# EAGLE board SparkFun_MEMS_Microphone_Breakout_ICS40180 (EAGLE 9.6.2)
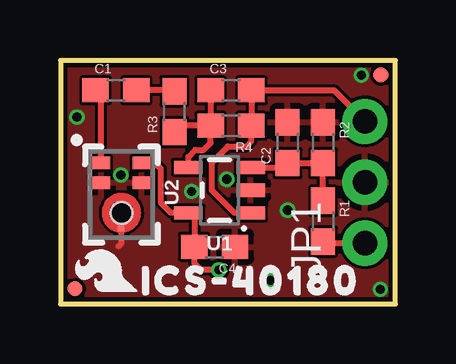
[diagram p0: board, top side]
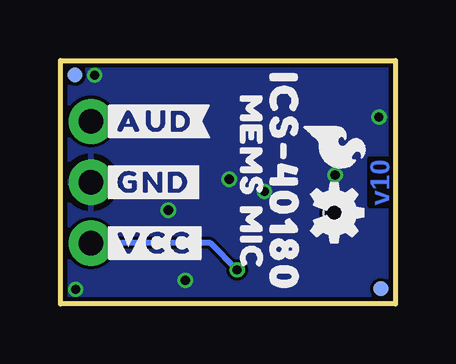
[diagram p1: board, bottom side, seen from below]

Size 13.97 x 10.16 mm. Coordinates in mm from the lower left corner, seen from the top.
Outline: 0,0 13.97,0 13.97,10.16 0,10.16 0,0
Copper layers (1*16): Top 0.035mm / dielectric 1.5mm / Bottom 0.035mm
Design rules "SparkFun-2-Layer-Minimum-JLCPCB": minimum track width 5mil, minimum drill 0.3mm, track to track 5mil, track to pad 5mil, pad to pad 5mil, via to via 5mil, smd to smd 5mil, copper to edge 7mil, drill to drill 7mil, minimum pad ring 5mil, minimum via ring 5mil, stop-mask expansion 2.5mil, vias tented up to drill 25mil, thermal gap 10mil

## Footprints (pad centres in the part's own frame; a part is rotated, then mirrored left to right if it is on the bottom)
0603 = smd 1.1 x 1: 1 -0.85,0; 2 0.85,0
FIDUCIAL-MICRO = smd 0.635 x 0.635: 1 0,0
1X03_NO_SILK = drill 1.016 pad 1.88: 1 0,0; 2 2.54,0; 3 5.08,0
SOT23-5 = smd 0.55 x 1.2: 1 -0.95,-1.3; 2 0,-1.3; 3 0.95,-1.3; 4 0.95,1.3; 5 -0.95,1.3
ICS40180 = smd 0.522 x 0.725: 1 -2.074,-0.838; 2 -1.252,-0.838; 4 -1.252,0.838; 5 -2.074,0.838 | smd 0.25 x 0.25: 3 0.66,-0.01 | hole 0.9: 0,0

## Placement (x,y rotation side)
C1  4.7uF  [0603]  2.31,8.92 0 top
C2  1.0uF  [0603]  9.47,6.73 90 top
C3  27pF  [0603]  7.11,8.92 0 top
C4  0.1uF  [0603]  6.43,2.39 180 top
FD1  FIDUCIALUFIDUCIAL  [FIDUCIAL-MICRO]  13.36,9.55 0 top
FD2  FIDUCIALUFIDUCIAL  [FIDUCIAL-MICRO]  13.36,9.55 0 bottom
FD3  FIDUCIALUFIDUCIAL  [FIDUCIAL-MICRO]  0.61,0.64 0 top
FD4  FIDUCIALUFIDUCIAL  [FIDUCIAL-MICRO]  0.61,0.64 0 bottom
FRAME2  FRAME-LETTER  [CREATIVE_COMMONS]  -19.05,-11.43 0 top  (outside the outline)
JP1  [1X03_NO_SILK]  12.7,2.54 90 top
LOGO1  SFE_LOGO_FLAME.1_INCH  [SFE_LOGO_FLAME_.1]  2.51,6.55 270 bottom
LOGO2  OSHW-LOGOMINI  [OSHW-LOGO-MINI]  2.54,3.81 270 bottom
LOGO3  SFE_LOGO_FLAME.1_INCH  [SFE_LOGO_FLAME_.1]  1.88,1.37 90 top
R1  10k  [0603]  10.95,3.45 270 top
R2  10k  [0603]  10.95,6.73 270 top
R3  4.7k  [0603]  4.75,8.03 90 top
R4  300k  [0603]  7.11,7.44 180 top
U1  OPA344  [SOT23-5]  6.63,4.75 90 top
U2  ICS40180  [ICS40180]  2.54,3.81 270 top
U$1  [ICS#401800]  4.67,5.08 270 bottom
U$2  [MEMS_MIC0]  6.02,5.08 270 bottom
U$3  [#GND#0]  12.32,5.08 0 bottom
U$4  [#VCC#0]  12.32,2.54 0 bottom
U$5  [#AUD#0]  12.32,7.62 0 bottom
U$6  [ICS#401800]  7.92,0.97 0 top

## Library data of the parts
C1 = SparkFun-Capacitors; PROD_ID: CAP-08280
C2 = SparkFun-Capacitors; PROD_ID: CAP-00868
C3 = SparkFun-Capacitors; PROD_ID: CAP-09989
C4 = SparkFun-Capacitors; PROD_ID: CAP-00810
FD1-FD4 FRAME2 LOGO1-LOGO3 = SparkFun-Aesthetics
JP1 = SparkFun-Connectors
R1 R2 = SparkFun-Resistors; PROD_ID: RES-00824
R3 = SparkFun-Resistors; PROD_ID: RES-07857
R4 = SparkFun-Resistors; PROD_ID: RES-10809
U1 = SparkFun-IC-Amplifiers; PROD_ID: IC-08251
U2 = ICS-40180; PROD_ID: IC-15819
U$1-U$6 = output

## Nets
AUD: C3.2 JP1.3 R4.1 U1.1
GND: C2.2 C4.1 JP1.2 R2.1 U1.2 U2.2 U2.3 U2.4
N$1: C1.1 U2.1
N$2: C3.1 R3.1 R4.2 U1.4
N$6: C1.2 R3.2
N$7: C2.1 R1.1 R2.2 U1.3
VCC: C4.2 JP1.1 R1.2 U1.5 U2.5

## Tracks (layer width: path | path; a pad name or v marks a point on that pad's centre or on a via)
AUD
  Top 0.254: U1.1 7.25,3.8 6.31,4.74 6.31,5.9 6.99,6.58 7.75,6.58 7.96,6.79 R4.1 C3.2 11.4,8.91 JP1.3
GND  (via drill 0.38)
  Top 0.254: U2.3 2.53,2.53 2.41,2.41
  other vias: 6.93,5.21 0.69,7.8 12.55,9.55 13.34,0.61 8.76,0.99 2.51,5.38 9.47,3.91 5.46,4.7
  pour Bottom: 0,0 0,10.16 13.97,10.16 13.97,0
  pour Top: 0,0 0,10.16 13.97,10.16 13.97,0
N$1
  Top 0.254: C1.1 1.7,8.68 U2.1
N$2
  Top 0.254: C3.1 R4.2 | R4.2 5.02,7.44 R3.1 | U1.4 5.33,6.14 5.61,6.43 5.97,6.43 6.26,6.72 R4.2
N$6
  Top 0.254: R3.2 4.71,8.91 C1.2
N$7
  Top 0.254: U1.3 9.29,5.7 C2.1 R2.2 R1.1
VCC  (via drill 0.38)
  Top 0.254: U2.5 3.95,5.88 4.19,5.64 4.19,4.22 4.61,3.8 U1.5 5.58,3.55 C4.2 5.58,1.71 5.87,1.42 v6.6,1.42 | R1.2 11.01,2.54 JP1.1
  Bottom 0.254: v6.6,1.42 7.72,2.54 JP1.1

## Text on the board
Bottom: v10
tValues: DNP | Mic Breakout
Measures: Units: INCHES
tDocu: Pete Lewis